# Altium PCB H bridge circuit.PcbDoc
Units mm, origin at the board's own origin, x right, y up, seen from the top; angles counter-clockwise.
Board outline 46.04 x 31.11 mm, 2 copper layers (Top Layer, Bottom Layer); 34 components, 30 nets, 89 pads, 0 vias.
Unrouted connection lines stored in the file: 56.
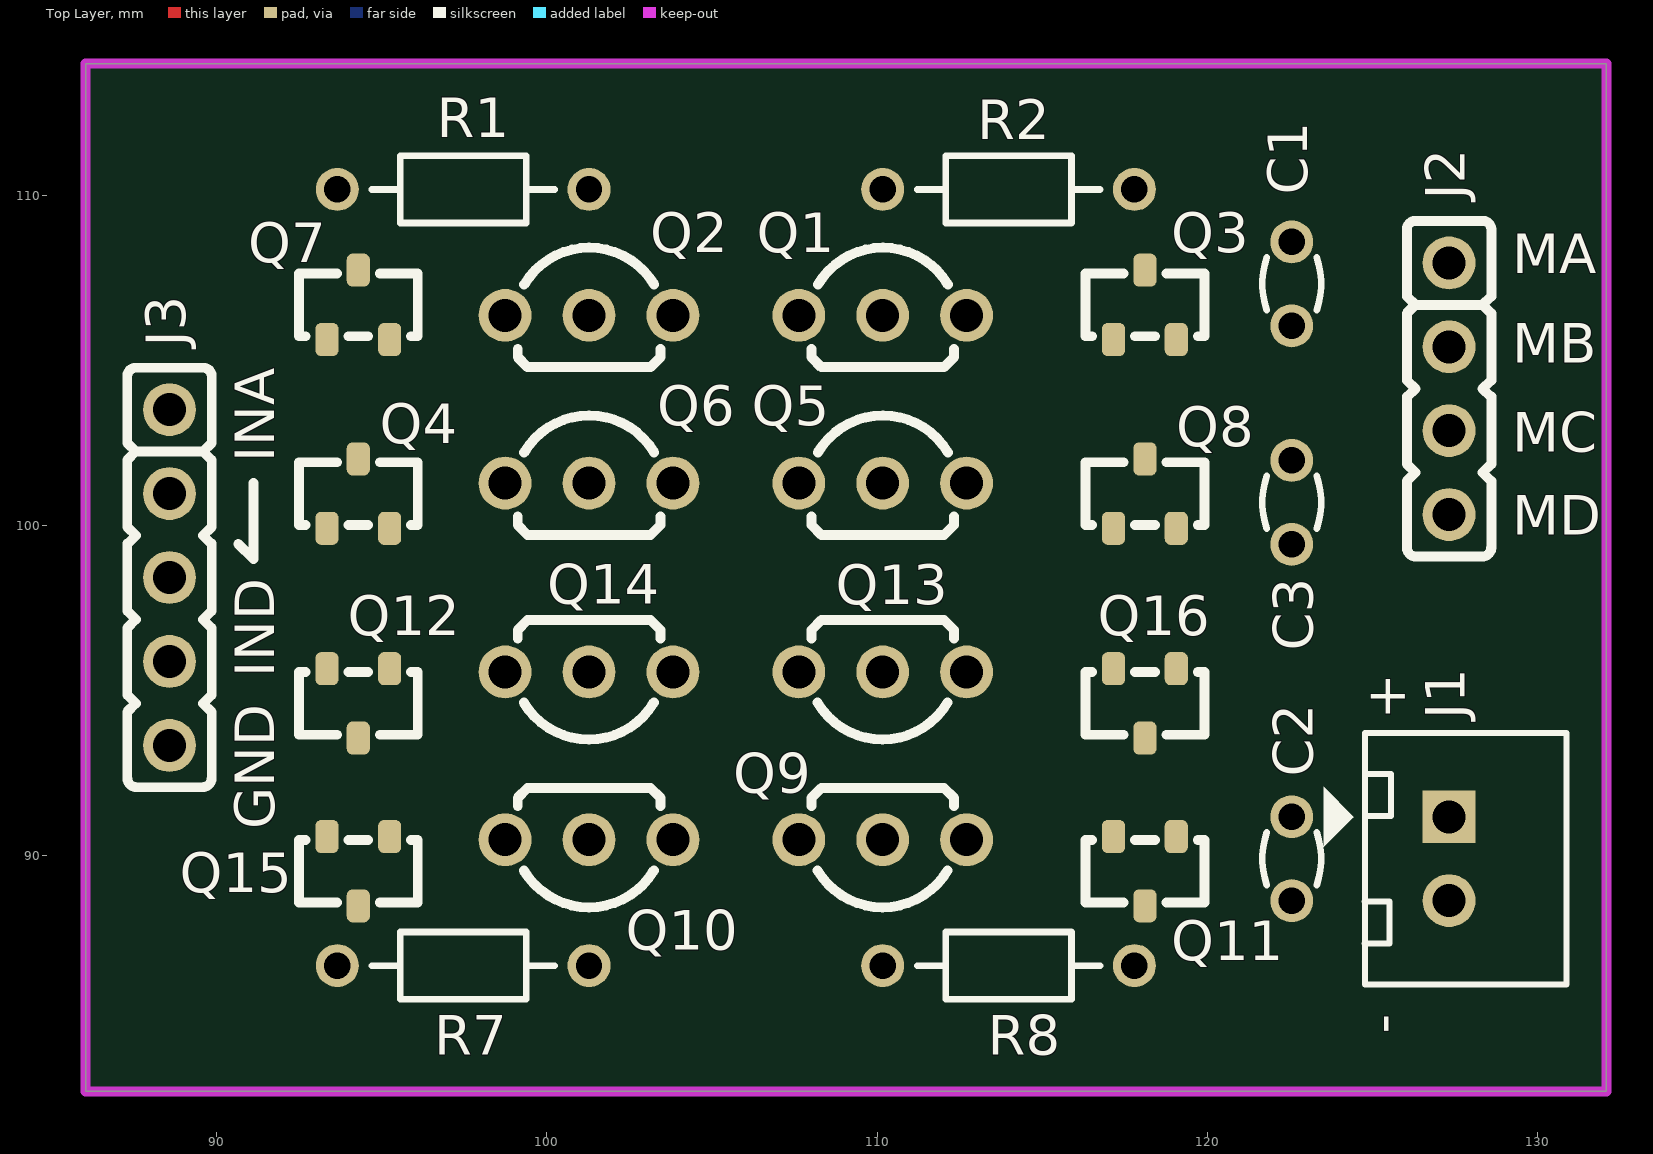
[diagram p0: Top Layer view]
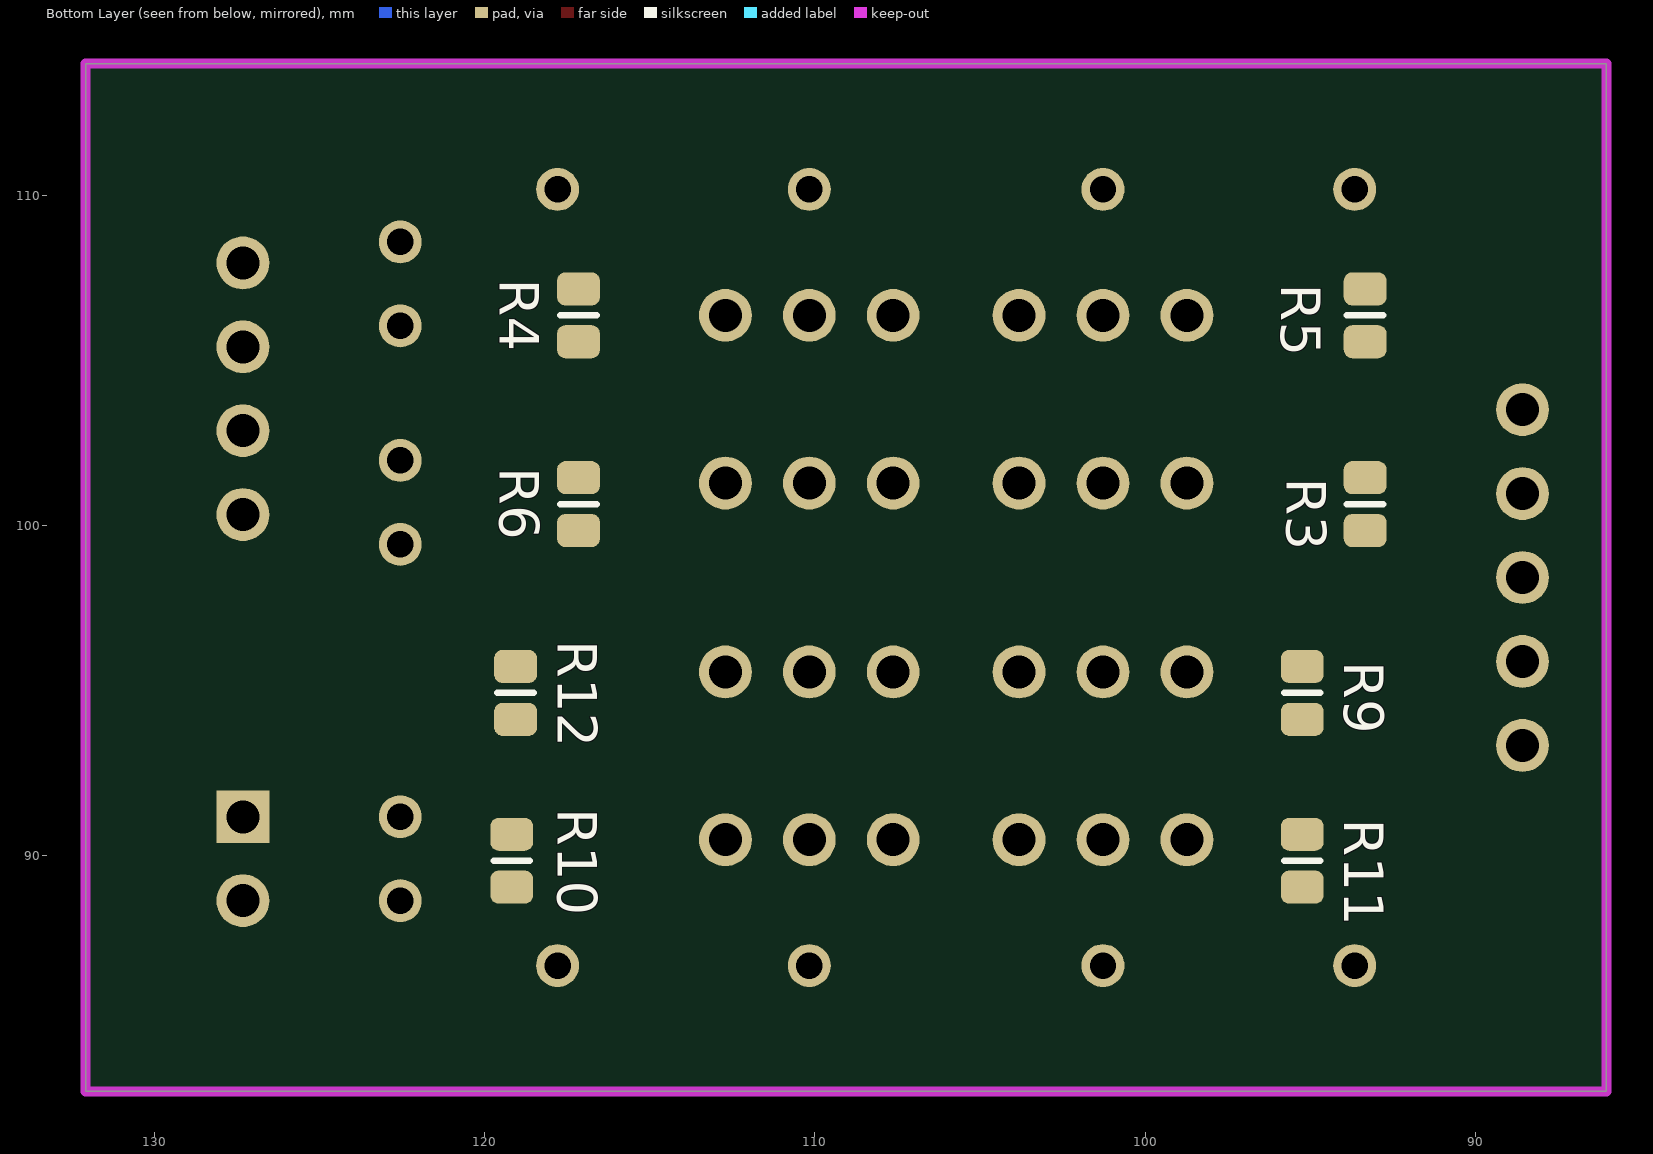
[diagram p1: Bottom Layer view, seen from below]

## Layer stack, top to bottom
Top Solder: solder mask 0.0102, Solder Resist, Dk 3.5
Top Layer: signal copper 0.0356
Dielectric1: dielectric 0.32, FR-4, Dk 4.8
Bottom Layer: signal copper 0.0356
Bottom Solder: solder mask 0.0102, Solder Resist, Dk 3.5

## Board outline
86.042,82.867 132.08,82.867 132.08,113.983 86.042,113.983

## Design rules (kind name [scope] priority, off if disabled: settings)
Clearance [All] p1: gap=0.254 ignorepadtopadclearanceinfootprint=FALSE except(0: Arc-Hole Track-Hole SMDPad-Hole THPad-Hole Via-Hole Fill-Hole Poly-Hole Region-Hole Text-Hole)
PlaneConnect [All] p1: planeconnectstyle=Relief reliefexpansion=0.508 reliefentries=4 reliefconductorwidth=0.5 reliefairgap=0.254
PolygonConnect [All] p1: connectstyle=Relief reliefconductorwidth=0.5 reliefentries=4 polygonreliefangle="90 Angle" airgapwidth=0.3
RoutingVias [All] p1: holewidth=0.3 width=0.7 viastyle="Through Hole" minholewidth=0.3 minwidth=0.7 maxholewidth=0.6 maxwidth=1.1
SolderMaskExpansion [All] p1: expansion=0.102 istentingtop=FALSE
Width [All] p1: maxlimit=2 minlimit=0.5 preferedwidth=0.5
29 further rules are at their usual default settings.

## Components (designator, comment, footprint, x,y, rotation, side; value= is the part's Value field where it differs from the comment)
C1 "5WF104MABAA" C0_1uF 122.555,107.315 r270 top
C2 "5WF104MABAA" C0_1uF 122.555,89.912 r90 top
C3 "5WF104MABAA" C0_1uF 122.555,100.699 r270 top
J1 "OSTTC-02-2162" CON2 127.317,91.182 r270 top
J2 "2012-254-1x04-SG" Header_4 127.317,104.14 r270 top
J3 "2012-254-1x05-SG" Header_5 88.582,98.425 r270 top
Q1 "SS8550" SS8550 110.172,106.362 r0 top
Q2 "SS8550" SS8550 101.282,106.362 r0 top
Q3 "2SC1815-HF" 2SC1815-HF 118.11,106.68 r0 top
Q4 "2SC1815-HF" 2SC1815-HF 94.298,100.965 r0 top
Q5 "SS8050" SS8050 110.172,101.282 r0 top
Q6 "SS8050" SS8050 101.282,101.282 r0 top
Q7 "2SC1815-HF" 2SC1815-HF 94.297,106.68 r0 top
Q8 "2SC1815-HF" 2SC1815-HF 118.11,100.965 r0 top
Q9 "SS8550" SS8550 110.172,90.487 r180 top
Q10 "SS8550" SS8550 101.282,90.487 r180 top
Q11 "2SC1815-HF" 2SC1815-HF 118.11,89.535 r180 top
Q12 "2SC1815-HF" 2SC1815-HF 94.297,94.615 r180 top
Q13 "SS8050" SS8050 110.172,95.567 r180 top
Q14 "SS8050" SS8050 101.282,95.567 r180 top
Q15 "2SC1815-HF" 2SC1815-HF 94.297,89.535 r180 top
Q16 "2SC1815-HF" 2SC1815-HF 118.11,94.615 r180 top
R1 "CF1/4W220RJ25" "Res AXIAL-0.3" 97.472,110.172 r0 top
R2 "CF1/4W220RJ25" "Res AXIAL-0.3" 113.983,110.172 r180 top
R3 "CR05JL7-2K2" RESC2012L 93.345,100.647 r270 bottom
R4 "CR05JL7-2K2" RESC2012L 117.16,106.362 r90 bottom
R5 "CR05JL7-2K2" RESC2012L 93.345,106.362 r270 bottom
R6 "CR05JL7-2K2" RESC2012L 117.157,100.647 r90 bottom
R7 "CF1/4W220RJ25" "Res AXIAL-0.3" 97.472,86.677 r0 top
R8 "CF1/4W220RJ25" "Res AXIAL-0.3" 113.983,86.677 r180 top
R9 "CR05JL7-2K2" RESC2012L 95.25,94.932 r90 bottom
R10 "CR05JL7-2K2" RESC2012L 119.18,89.852 r270 bottom
R11 "CR05JL7-2K2" RESC2012L 95.25,89.852 r90 bottom
R12 "CR05JL7-2K2" RESC2012L 119.062,94.932 r270 bottom

## Footprints (in the part's own frame and the unit in brackets; to place one, negate y for a bottom-side part, rotate by r counter-clockwise, add the part's x,y. Pads: shape width x height; smd on the part's side, far side on the other; paste and mask are expansions set on the pad)
2SC1815-HF [mm] "SOT23-3"
  rrect50% 0.7x1 smd: 1(-0.95,-1.05) 2(0.95,-1.05) 3(0,1.05)
  silkscreen extent -1.8,-0.95 1.8,0.95, body extent -1.5,-1.32 1.5,1.32, height 1.08
C0_1uF [mm] "Tu gom 3.5wf104mabaa 05 x 1.78 x 3.43 mm (WxTxH max); Pin Spacing 2.54 mm (typ)"
  round 1.3 hole 0.8: 1(-1.27,0) 2(1.27,0)
  silkscreen extent -0.8,-0.89 0.8,0.89, body extent -2.92,-0.85 2.92,0.85, height 6.42
CON2 [mm] "CON2"
  rect 1.6x1.6 hole 1 mask+0.1: 1(0,0)
  round 1.6 hole 1 mask+0.1: 2(2.54,0)
  silkscreen extent -2.54,-3.8 5.08,3.56, body extent -1.73,-1.78 4.27,2.72, height 6
Header_4 [mm] "Connector DIP, 4Pin_2.54mm"
  round 1.6 hole 1 mask+0.1: 1(-3.81,0) 2(-1.27,0) 3(1.27,0) 4(3.81,0)
  silkscreen extent -5.08,-1.28 5.08,1.28, body extent -5.08,-1.27 5.08,1.27, height 10.1
Header_5 [mm] "Connector DIP, 5Pin_2.54mm"
  round 1.6 hole 1 mask+0.1: 1(-5.08,0) 2(-2.54,0) 3(0,0) 4(2.54,0) 5(5.08,0)
  silkscreen extent -6.35,-1.28 6.35,1.28, body extent -6.35,-1.27 6.35,1.27, height 10.1
"Res AXIAL-0.3" [mm] "Axial Device, Thru-Hole; 2 Leads; 0.3 in Pin Spacing"
  round 1.3 hole 0.8: 1(-3.81,0) 2(3.81,0)
  silkscreen extent -2.77,-1.02 2.77,1.02, body extent -4.07,-0.8 4.08,0.8, height 1.6
RESC2012L [mm] "Chip Resistor, Body 2.0x1.3mm, IPC High Density"
  rrect50% 1x1.3 smd: 1(-0.8,0) 2(0.8,0)
  silkscreen extent 0,-0.55 0,0.55, body extent -1,-0.63 1,0.63, height 0.6
SS8050 [mm] "TO-92 Bent Lead, Flat Index; 3 In-Line, Axial Leads; Body Dia. 4.5mm; Leads 0.51 x 0.48 mm (max)"
  round 1.6 hole 1 mask+0.1: 1(-2.54,0) 2(0,0) 3(2.54,0)
  silkscreen extent -2.16,-1.57 2.16,2.05, body extent -2.79,-1.59 2.79,2.61, height 10
SS8550 [mm] "TO-92 Bent Lead, Flat Index; 3 In-Line, Axial Leads; Body Dia. 4.5mm; Leads 0.51 x 0.48 mm (max)"
  round 1.6 hole 1 mask+0.1: 1(-2.54,0) 2(0,0) 3(2.54,0)
  silkscreen extent -2.16,-1.57 2.16,2.05, body extent -2.79,-1.59 2.79,2.61, height 10

## Part data
C1 C2 C3: "CAP Y5P CAPNTO 0.1uF 25V 20%"
J1: "Terminal Block 2 Poles 5.08mm Blue"
J2: "Male Header 04 Pin 2.54mm Straight"
J3: "Male Header 05 Pin 2.54mm Straight"
Q1 Q2 Q9 Q10: "Trans PNP -25V -1.5A TO-92"
Q3 Q4 Q7 Q8 Q11 Q12 Q15 Q16: "Trans NPN 50V 150mA SOT-23"
Q5 Q6 Q13 Q14: "Trans NPN 25V 1.5A TO-92"
R1 R2 R7 R8: "RES CF AXIAL-0.3 5% 1/4W 220R"
R3 R4 R5 R6 R9 R10 R11 R12: "RES CR 0805 5% 1/8W 2K2"

## Nets (pads, with @x,y where several pads share a name; then routed paths per layer and width w, separated by ;. In a path a pad name is that pad's centre, name@x,y a point inside that pad or via, vN(x,y) a via of type N, cw(c..) or ccw(c..) an arc to the next point about the centre after c; other vN are vias at no path point)
GND: C2.1 J1.2 J3.5 Q5.1 Q6.1 Q7.2 Q8.2 Q13.1 Q14.1 Q15.2 Q16.2
IN_A: J3.1 R3.1 R6.2
IN_B: J3.2 R4.2 R5.1
IN_C: J3.3 R9.1 R12.2
IN_D: J3.4 R10.2 R11.1
M_A: C1.1 J2.1 Q2.3 Q6.3
M_B: C1.2 J2.2 Q1.3 Q5.3
M_C: C3.1 J2.3 Q10.3 Q14.3
M_D: C3.2 J2.4 Q9.3 Q13.3
NetQ1_2: Q1.2 R2.2
NetQ2_2: Q2.2 R1.2
NetQ3_1: Q3.1 Q8.3 R4.1
NetQ3_3: Q3.3 R2.1
NetQ4_1: Q4.1 Q7.3 R3.2
NetQ4_3: Q4.3 R1.1
NetQ7_1: Q7.1 R5.2
NetQ8_1: Q8.1 R6.1
NetQ9_2: Q9.2 R8.2
NetQ10_2: Q10.2 R7.2
NetQ11_1: Q11.1 Q16.3 R10.1
NetQ11_3: Q11.3 R8.1
NetQ12_1: Q12.1 Q15.3 R9.2
NetQ12_3: Q12.3 R7.1
NetQ15_1: Q15.1 R11.2
NetQ16_1: Q16.1 R12.1
TA: Q4.2 Q5.2
TB: Q3.2 Q6.2
TC: Q12.2 Q13.2
TD: Q11.2 Q14.2
VCC: C2.2 J1.1 Q1.1 Q2.1 Q9.1 Q10.1

## Keep-outs
Keep-Out Layer:
  the board outline again, w0.3

## Silkscreen, mask and mechanical layers (free items; w line width, h text height)
Top Overlay:
  lines w0.3: 90.664,99.441 91.123,98.982 91.123,99.06 91.123,101.282
  text "MA" at 129.222,107.632 h1.2
  text "MB" at 129.222,104.934 h1.2
  text "MC" at 129.222,102.235 h1.2
  text "INA" at 91.757,101.917 h1.2 r90
  text "MD" at 129.222,99.713 h1.2
  text "IND" at 91.757,95.409 h1.2 r90
  text "+" at 124.777,94.297 h1.2
  text "GND" at 91.757,90.805 h1.2 r90
  text "-" at 125.877,84.614 h1.2 r90

## Text inside footprints (layer, text, board x,y; h text height)
J2: Mechanical 1 "4" at 127.063,100.584 h1.2 r270; Mechanical 1 "1" at 127.063,108.204 h1.2 r270
J3: Mechanical 1 "1" at 88.328,103.759 h1.2 r270; Mechanical 1 "5" at 88.328,93.599 h1.2 r270
Q1: Mechanical 1 "E" at 107.379,105.981 h0.8; Mechanical 1 "B" at 109.918,105.981 h0.8; Mechanical 1 "C" at 112.459,105.981 h0.8
Q2: Mechanical 1 "E" at 98.489,105.981 h0.8; Mechanical 1 "B" at 101.028,105.981 h0.8; Mechanical 1 "C" at 103.569,105.981 h0.8
Q3: Mechanical 1 "E" at 118.87,105.825 h1; Mechanical 1 "C" at 117.825,106.87 h1; Mechanical 1 "B" at 116.97,105.825 h1
Q4: Mechanical 1 "E" at 95.058,100.11 h1; Mechanical 1 "C" at 94.013,101.155 h1; Mechanical 1 "B" at 93.158,100.11 h1
Q5: Mechanical 1 "C" at 112.459,100.901 h0.8; Mechanical 1 "B" at 109.918,100.901 h0.8; Mechanical 1 "E" at 107.379,100.901 h0.8
Q6: Mechanical 1 "C" at 103.569,100.901 h0.8; Mechanical 1 "B" at 101.028,100.901 h0.8; Mechanical 1 "E" at 98.489,100.901 h0.8
Q7: Mechanical 1 "E" at 95.058,105.825 h1; Mechanical 1 "C" at 94.012,106.87 h1; Mechanical 1 "B" at 93.157,105.825 h1
Q8: Mechanical 1 "B" at 116.97,100.11 h1; Mechanical 1 "C" at 117.825,101.155 h1; Mechanical 1 "E" at 118.87,100.11 h1
Q9: Mechanical 1 "E" at 112.966,90.868 h0.8 r180; Mechanical 1 "B" at 110.426,90.868 h0.8 r180; Mechanical 1 "C" at 107.886,90.868 h0.8 r180
Q10: Mechanical 1 "E" at 104.076,90.868 h0.8 r180; Mechanical 1 "B" at 101.536,90.868 h0.8 r180; Mechanical 1 "C" at 98.996,90.868 h0.8 r180
Q11: Mechanical 1 "E" at 117.35,90.39 h1 r180; Mechanical 1 "C" at 118.395,89.345 h1 r180; Mechanical 1 "B" at 119.25,90.39 h1 r180
Q12: Mechanical 1 "E" at 93.537,95.47 h1 r180; Mechanical 1 "C" at 94.583,94.425 h1 r180; Mechanical 1 "B" at 95.438,95.47 h1 r180
Q13: Mechanical 1 "C" at 107.886,95.948 h0.8 r180; Mechanical 1 "B" at 110.426,95.948 h0.8 r180; Mechanical 1 "E" at 112.966,95.948 h0.8 r180
Q14: Mechanical 1 "C" at 98.996,95.948 h0.8 r180; Mechanical 1 "B" at 101.536,95.948 h0.8 r180; Mechanical 1 "E" at 104.076,95.948 h0.8 r180
Q15: Mechanical 1 "E" at 93.537,90.39 h1 r180; Mechanical 1 "C" at 94.582,89.345 h1 r180; Mechanical 1 "B" at 95.437,90.39 h1 r180
Q16: Mechanical 1 "E" at 117.35,95.47 h1 r180; Mechanical 1 "C" at 118.395,94.425 h1 r180; Mechanical 1 "B" at 119.25,95.47 h1 r180